# Altium PCB PCB2.PcbDoc
Units mil, origin at the board's own origin, x right, y up, seen from the top; angles counter-clockwise.
Board outline 2165.35 x 4330.71 mil, 2 copper layers (Top Layer, Bottom Layer); 8 components, 38 nets, 180 pads, 57 vias.
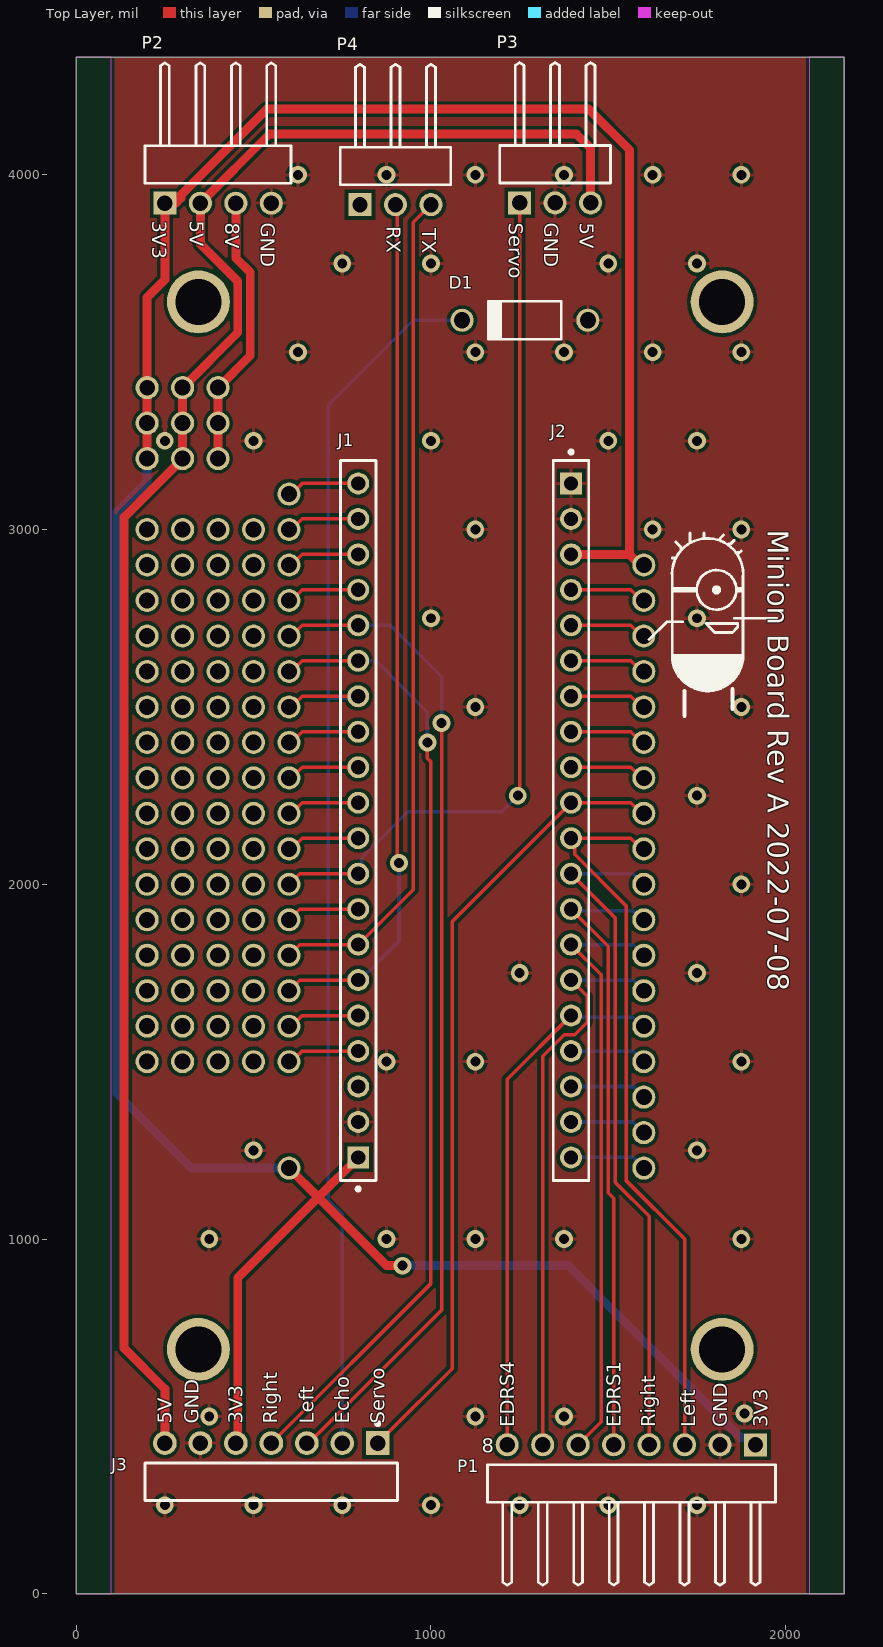
[diagram p0: Top Layer view]
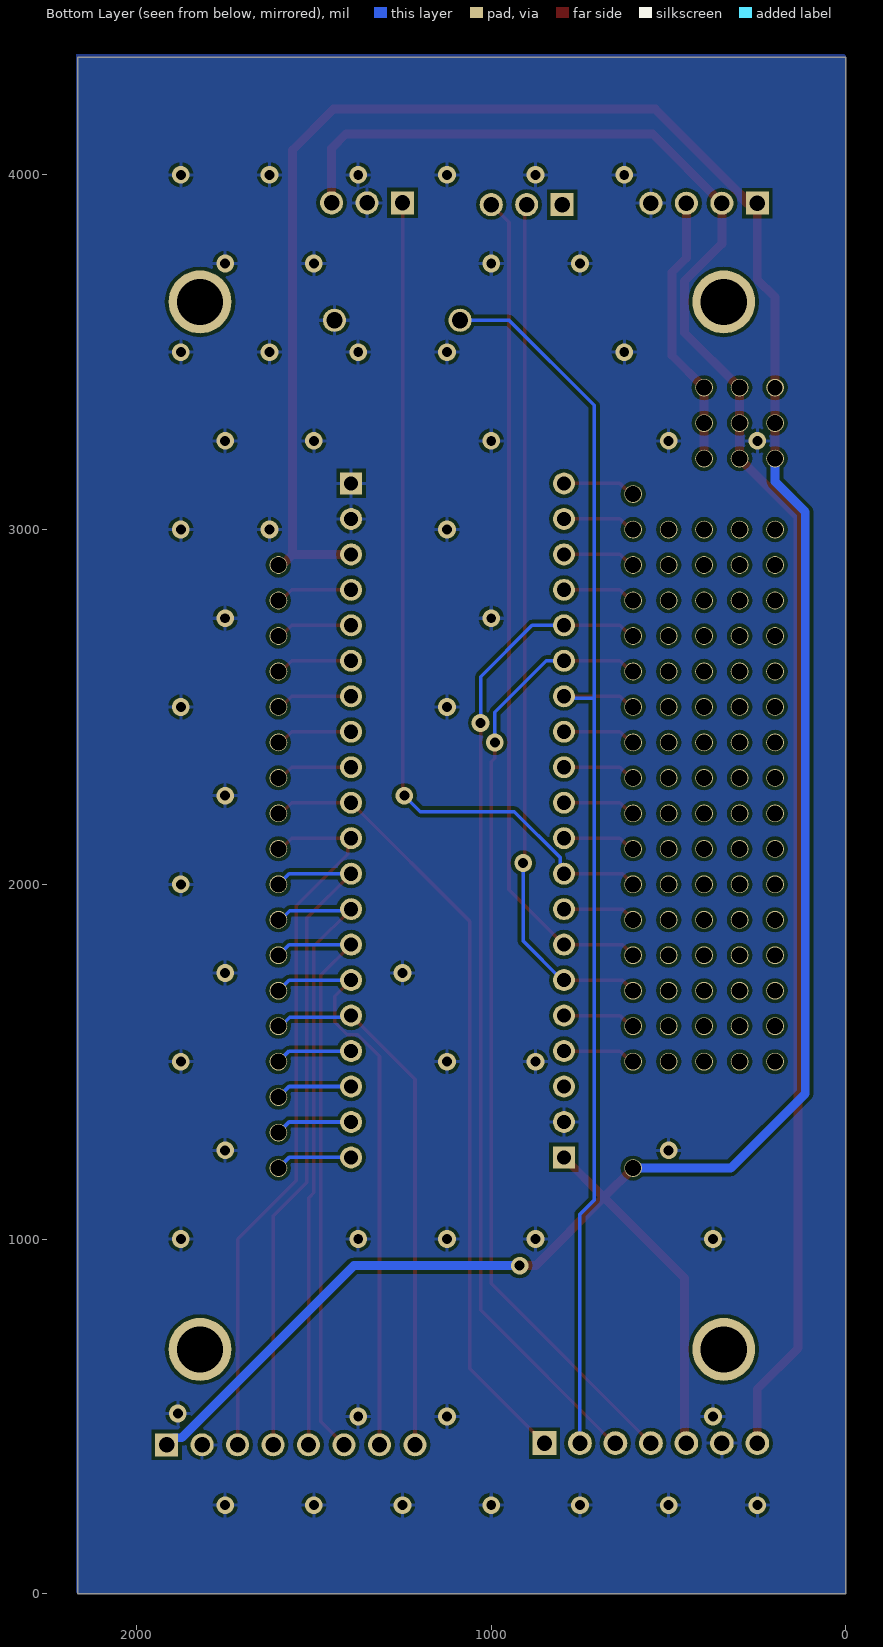
[diagram p1: Bottom Layer view, seen from below]
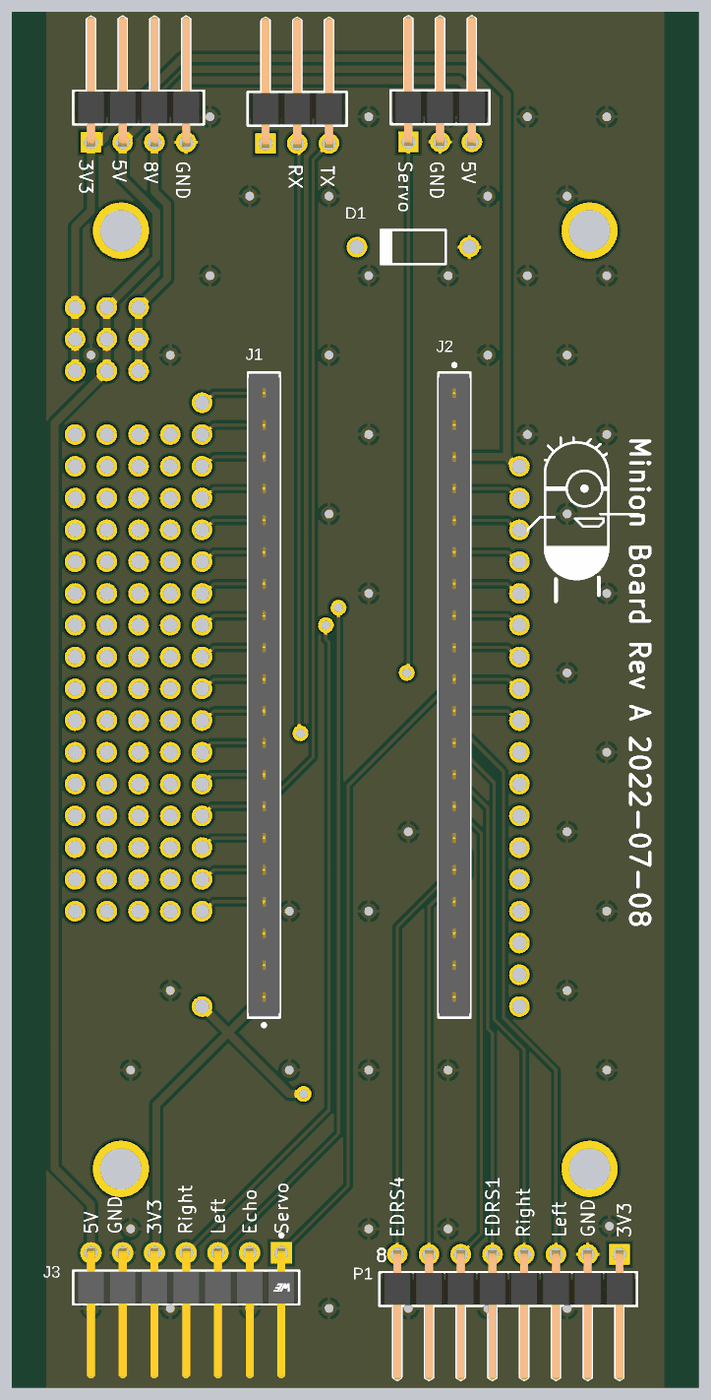
[diagram p2: 3D render of the assembled board from above, using the file's embedded part models]

## Layer stack, top to bottom
Top Solder: solder mask 0.4, Solder Resist, Dk 3.5
Top Layer: signal copper 1.4
Dielectric 1: dielectric 12.6, FR-4, Dk 4.8
Bottom Layer: signal copper 1.4
Bottom Solder: solder mask 0.4, Solder Resist, Dk 3.5

## Board outline
0,0 0,4330.71 2165.35,4330.71 2165.35,0

## Design rules (kind name [scope] priority, off if disabled: settings)
Clearance [All] p1: gap=10 ignorepadtopadclearanceinfootprint=FALSE except(0: Arc-Hole Track-Hole SMDPad-Hole THPad-Hole Via-Hole Fill-Hole Poly-Hole Region-Hole Text-Hole)
PolygonConnect [All] p1: connectstyle=Relief reliefconductorwidth=10 reliefentries=4 polygonreliefangle="90 Angle" airgapwidth=10
RoutingVias [All] p1: holewidth=28 width=50 viastyle="Through Hole" minholewidth=28 minwidth=50 maxholewidth=28 maxwidth=50
SolderMaskExpansion [All] p1: expansion=4 istentingtop=FALSE
Width "PWR/GND Thickness" [InNet('GND') Or InNet('5V')Or InNet('3V3') Or InNet('8V')] p1: maxlimit=25 minlimit=25 preferedwidth=25 minimp=50.000000 maximp=50.000000 favimp=50.000000
Width [All] p2: maxlimit=10 minlimit=10 preferedwidth=10
30 further rules are at their usual default settings.

## Components (designator, comment, footprint, x,y, rotation, side; value= is the part's Value field where it differs from the comment)
D1 "1N4728A" FAIR-DO-41-2_V 1265,3590 r180 top
J1 "ESQ-120-14-G-S" FP-ESQ-120-14-G-S-MFG 795,2180 r90 top locked
J2 "ESQ-120-14-G-S" FP-ESQ-120-14-G-S-MFG 1395,2180 r270 top locked
J3 "61300711021" FP-61300711021-MFG 550,315.75 r180 top locked
P1 "61300811021" 61300811021 1565,310.94 r0 top locked
P2 "61300411021" 61300411021 400,4029.06 r180 top locked
P3 "61300311021" 61300311021 1350,4030 r180 top locked
P4 "61300311021" 61300311021 900,4025 r180 top locked

## Footprints (in the part's own frame and the unit in brackets; to place one, negate y for a bottom-side part, rotate by r counter-clockwise, add the part's x,y. Pads: shape width x height; smd on the part's side, far side on the other; paste and mask are expansions set on the pad)
61300311021 [mm] "Pin Header, pitch 2.54 mm, THT, Angled, single row, 3p"
  rect 1.65x1.65 hole 1.1: 1(2.54,2.77)
  round 1.65 hole 1.1: 2(0,2.77) 3(-2.54,2.77)
  silkscreen extent -3.96,-7.27 3.96,1.35, body extent -3.81,-7.27 3.81,3.09, height 2.58
61300411021 [mm] "Pin Header, pitch 2.54 mm, THT, Angled, single row, 4p"
  rect 1.65x1.65 hole 1.1: 1(3.81,2.77)
  round 1.65 hole 1.1: 2(1.27,2.77) 3(-1.27,2.77) 4(-3.81,2.77)
  silkscreen extent -5.23,-7.27 5.23,1.35, body extent -5.08,-7.27 5.08,3.09, height 2.58
61300811021 [mm] "Pin Header, pitch 2.54 mm, THT, Angled, single row, 8p"
  rect 1.65x1.65 hole 1.1: 1(8.89,2.77)
  round 1.65 hole 1.1: 2(6.35,2.77) 3(3.81,2.77) 4(1.27,2.77) 5(-1.27,2.77) 6(-3.81,2.77) 7(-6.35,2.77) 8(-8.89,2.77)
  silkscreen extent -10.31,-7.27 10.31,1.35, body extent -10.16,-7.27 10.16,3.09, height 2.58
FAIR-DO-41-2_V [mm] "2-Leads, Axial leaded, Body 2.72x5.2mm, Pin Spacing 9mm"
  round 1.65 hole 1.15: 1(-4.5,0) 2(4.5,0)
  silkscreen extent -2.6,-1.36 2.6,1.36, body extent -4.93,-1.36 4.93,1.36, height 2.71
FP-61300711021-MFG [mm]
  rect 1.7x1.7 hole 1.1 paste-1000 mask+0: 1(-7.62,-2.77)
  round 1.7 hole 1.1 paste-1000 mask+0: 2(-5.08,-2.77) 3(-2.54,-2.77) 4(0,-2.77) 5(2.54,-2.77) 6(5.08,-2.77) 7(7.62,-2.77)
  silkscreen extent -9.04,-4.29 9.04,1.35, body extent -9.14,-3.72 9.14,7.92, height 0.25
FP-ESQ-120-14-G-S-MFG [mm]
  rect 1.57x1.57 hole 1.02 paste-1000 mask+0: 1(-24.13,0)
  round 1.57 hole 1.02 paste-1000 mask+0: 2(-21.59,0) 3(-19.05,0) 4(-16.51,0) 5(-13.97,0) 6(-11.43,0) 7(-8.89,0) 8(-6.35,0) 9(-3.81,0) 10(-1.27,0) 11(1.27,0) 12(3.81,0) 13(6.35,0) 14(8.89,0) 15(11.43,0) 16(13.97,0) 17(16.51,0) 18(19.05,0) 19(21.59,0) 20(24.13,0)
  silkscreen extent -26.51,-1.27 25.78,1.27, body extent -25.88,-1.37 25.88,1.37, height 0.25

## Part data
D1: library part CMP-0892-00028-1, "Zener Diode, 3.3V, 1W, 5%, -65 to 200 degC, 2-Pin DO-41, Body 2.72 x 5.2 mm, RoHS", Manufacturer="Fairchild Semiconductor", Operating and Storage Temperature Range="-65 to 200 degC", Test Current IZ (mA)=76, Tolerance=5%, ComponentLink1Description="Manufacturer URL", ComponentLink1URL=http://www.fairchildsemi.com/, ComponentLink2Description=Datasheet, ComponentLink2URL=http://www.fairchildsemi.com/ds/1N/1N4744A.pdf, ComponentLink3Description="Package Specification", ComponentLink3URL=http://www.fairchildsemi.com/dwg/DO/DO41A.pdf, DatasheetVersion="Rev. H3", IR (uA)=100, Mounting Technology="Through Hole", PackageDescription="2-Pin Axial leaded, Body 2.72 x 5.2 mm, Lead Spread 25.4 mm", PackageReference=DO-41-2, PackageVersion="Rev. 2", PartNumber=1N4728A, PD (W)=1, RoHS=TRUE, VZ (Max.) (V)=3.465, VZ (Min.) (V)=3.135, ZZ (Max) (ohm)=10
J1 J2: library part CMP-02766-000124-1, "CONN SOCKET 20POS 0.1 GOLD PCB", Color=Black, Contact Resistance=10mR, Max Current Rating=6.9A, Max Operating Temperature=125°C, Max Voltage Rating (AC)=550V, Min Operating Temperature=-55°C, Connector Type=Receptacle, Contact Material=Bronze, Contact Plating=Gold, Depth=2.41mm, Gender=Receptacle, Housing Color=Black, Housing Material=Polyester, Length=51.31mm, Mount="Through Hole", Number of Contacts=20, Number of Positions=20, Number of Rows=1, Orientation=Straight, Packaging=Rail/Tube, Pitch=2.54mm, Radiation Hardening=No, REACH SVHC="No SVHC", Termination=Solder
J3: library part CMP-1502-01073-2, "CONN HEADER R/A 7POS 2.54MM", Color=Black, Connector Type="Male Pin", Contact Material=Copper, Contact Mating Length=0.236inch, Contact Plating=Gold, Contact Type="Male Pin", Gender=Male, Mount="Through Hole", Number of Contacts=7, Number of Positions=7, Number of Rows=1, Packaging=Bulk, Pitch=0.1inch, Series=WR-PHD, Termination=Solder
P1: library part CMP-1502-01075-1, "THT Angled Pin Header WR-PHD, Pitch 2.54 mm, Single Row, 8 pins", Contact Resistance=20mOhm, Manufacturer="Wurth Elektronik", Operating Temperature=-40to105degC, Rated Current=3A, Withstanding Voltage=500VAC, Working Voltage=250VAC, Datasheet URL=https://katalog.we-online.de/em/datasheet/6130xx11021.pdf, Gender=Male, Manufacturer URL=http://www.we-online.de, Mounting Technology=THT, Orientation=Angled, Package Reference=61300811021, Packaging=Bag, Part Number=61300811021, Pin Number=8, Pitch=2.54mm, Publisher=WurthElektronik, Row Number=Single
P2: library part CMP-1502-01063-1, "THT Angled Pin Header WR-PHD, Pitch 2.54 mm, Single Row, 4 pins", Contact Resistance=20mOhm, Manufacturer="Wurth Elektronik", Operating Temperature=-40to105degC, Rated Current=3A, Withstanding Voltage=500VAC, Working Voltage=250VAC, Datasheet URL=https://katalog.we-online.de/em/datasheet/6130xx11021.pdf, Gender=Male, Manufacturer URL=http://www.we-online.de, Mounting Technology=THT, Orientation=Angled, Package Reference=61300411021, Packaging=Bag, Part Number=61300411021, Pin Number=4, Pitch=2.54mm, Publisher=WurthElektronik, Row Number=Single
P3 P4: library part CMP-1502-01061-1, "THT Angled Pin Header WR-PHD, Pitch 2.54 mm, Single Row, 3 pins", Contact Resistance=20mOhm, Manufacturer="Wurth Elektronik", Operating Temperature=-40to105degC, Rated Current=3A, Withstanding Voltage=500VAC, Working Voltage=250VAC, Datasheet URL=https://katalog.we-online.de/em/datasheet/6130xx11021.pdf, Gender=Male, Manufacturer URL=http://www.we-online.de, Mounting Technology=THT, Orientation=Angled, Package Reference=61300311021, Packaging=Bag, Part Number=61300311021, Pin Number=3, Pitch=2.54mm, Publisher=WurthElektronik, Row Number=Single

## Free pads (board coordinates)
  round 177.17 hole 129.92: 12(344.49,688.98) 12(344.49,3641.73) 13(1820.87,688.98) 13(1820.87,3641.73)
  round 65 / inner rrect50% 67x50 / far side round 50 hole 43: 24(200,3400)
  round 65 / inner rrect50% 67x50 / far side round 50 hole 45: 35(300,3400) 36(400,3400) 39(400,3300) 40(300,3300) 41(200,3300) 42(200,3200) 43(300,3200) 44(400,3200) 46(200,1500) 46(200,2300) 46(400,1500) 46(400,2300) 47(200,2200) 47(200,3000) 47(400,2200) 47(400,3000) 48(200,2100) 48(200,2900) 48(400,2100) 48(400,2900) 49(200,2000) 49(200,2800) 49(400,2000) 49(400,2800) 50(200,1900) 50(200,2700) 50(400,1900) 50(400,2700) 51(200,1800) 51(200,2600) 51(400,1800) 51(400,2600) 52(300,1800) 52(300,2600) 52(500,1800) 52(500,2600) 53(300,1900) 53(300,2700) 53(500,1900) 53(500,2700) 54(300,2000) 54(300,2800) 54(500,2000) 54(500,2800) 55(300,2100) 55(300,2900) 55(500,2100) 55(500,2900) 56(300,2200) 56(300,3000) 56(500,2200) 56(500,3000) 57(300,1500) 57(300,2300) 57(500,1500) 57(500,2300) 58(600,2400) 58(1600,1400) 58(1600,2400) 59(600,2100) 59(600,2300) 59(600,3100) 59(1600,1300) 59(1600,2100) 59(1600,2300) 60(600,1200) 60(600,2000) 60(600,2200) 60(600,3000) 60(1600,1200) 60(1600,2000) 60(1600,2200) 61(600,1900) 61(600,2900) 61(1600,1900) 61(1600,2900) 62(600,1800) 62(600,2800) 62(1600,1800) 62(1600,2800) 63(600,1700) 63(600,2700) 63(1600,1700) 63(1600,2700) 64(200,1700) 64(200,2500) 64(400,1700) 64(400,2500) 65(200,1600) 65(200,2400) 65(400,1600) 65(400,2400) 66(300,1600) 66(300,2400) 66(500,1600) 66(500,2400) 67(300,1700) 67(300,2500) 67(500,1700) 67(500,2500) 68(600,1600) 68(600,2600) 68(1600,1600) 68(1600,2600) 69(600,1500) 69(600,2500) 69(1600,1500) 69(1600,2500)

## Via types
v1: diameter 50, hole 28, Top Layer to Bottom Layer, tented both sides, 52 vias
v2: diameter 50, hole 28, Top Layer to Bottom Layer, 5 vias

## Nets (pads, with @x,y where several pads share a name; then routed paths per layer and width w, separated by ;. In a path a pad name is that pad's centre, name@x,y a point inside that pad or via, vN(x,y) a via of type N, cw(c..) or ccw(c..) an arc to the next point about the centre after c; other vN are vias at no path point)
3V3: J1.1 J2.3 J3.5 P1.1 P2.1 pad.24 pad.41 pad.42 pad.60@600,1200 pad.61@1600,2900 | length 8554
  Top Layer w25: pad.42 pad.41 pad.24 200,3654.34 250,3704.34 P2.1 280.38,3920 295.02,3934.64 295.02,3942.77 537.25,4185 1445,4185 1560,4070 1560,2930.82 1559.18,2930 ; J3.5 455.57,430.37 455.57,890.57 682.5,1117.5 ; pad.60@600,1200 682.5,1117.5 ; J1.1 682.5,1117.5 ; v2(920,925) 875,925 682.5,1117.5 ; J2.3 1559.18,2930 ; pad.61@1600,2900 1589.18,2900 1559.18,2930
  Bottom Layer w25: pad.42 200,3135 115,3050 115,1410 325,1200 pad.60@600,1200 ; v2(920,925) 1387.75,925 1872.77,439.98 1895.02,439.98 P1.1
5V: J3.7 P2.2 P3.3 pad.35 pad.40 pad.43 | length 5070.7
  Top Layer w25: J3.7 250,577.27 135,692.27 135,3035 pad.43 pad.40 pad.35 455.57,3555.57 455.57,3699.67 350,3805.24 P2.2 545,4115 1410,4115 1450,4075 P3.3
8V: P2.3 pad.36 pad.39 pad.44 | length 774.3
  Top Layer w25: pad.44 pad.39 pad.36 490.57,3490.57 490.57,3724.92 450,3765.49 P2.3
bridge_servo: J1.9 P3.1 pad.60@600,2000 | length 2415
  Top Layer w10: pad.60@600,2000 630,2030 J1.9 ; 1250,2275 1250,2320 P3.1
  Bottom Layer w10: J1.9 804.91,2039.91 804.91,2074.91 935,2205 1200,2205 v2(1245,2250)
Echo: D1.2 J1.14 J3.2 pad.69@600,2500 | length 3713.5
  Top Layer w10: pad.69@600,2500 607.17,2500 637.17,2530 J1.14
  Bottom Layer w10: J3.2 750,1070 710,1110 710,2525 ; J1.14 790,2525 710,2525 ; D1.2 950,3590 710,3350 710,2525
EDRS1: J2.13 P1.5 pad.61@1600,1900 | length 1777.1
  Top Layer w10: J2.13 1500,1825 1500,1130.43 1515,1115.43 P1.5
  Bottom Layer w10: J2.13 1400,1925 1568.43,1925 1593.43,1900 pad.61@1600,1900
EDRS2: J2.14 P1.6 pad.62@1600,1800 | length 1689.6
  Top Layer w10: J2.14 1480,1745 1480,485 P1.6
  Bottom Layer w10: J2.14 1570,1830 pad.62@1600,1800
EDRS3: J2.15 P1.7 pad.63@1600,1700 | length 1616.1
  Top Layer w10: P1.7 1315,1514.92 1375.99,1575.91 1405.83,1575.91 1440.91,1610.99 1440.91,1684.09 J2.15
  Bottom Layer w10: J2.15 1570,1730 pad.63@1600,1700
EDRS4: J2.16 P1.8 pad.68@1600,1600 | length 1502
  Top Layer w10: P1.8 1215,1450 J2.16
  Bottom Layer w10: J2.16 1400,1625 1568.43,1625 1593.43,1600 pad.68@1600,1600
GND: D1.1 J1.2 J2.1 J2.2 J3.6 P1.2 P2.4 P3.2
  other v1: 250,250 500,250 750,250 1000,250 1250,250 1500,250 1750,250 375,500 1125,500 1375,500 1883.59,508.59 375,1000 875,1000 1125,1000 1375,1000 1875,1000 500,1250 1750,1250 875,1500 1125,1500 1875,1500 1250,1750 1750,1750 1875,2000 1750,2250 1125,2500 1875,2500 1000,2750 1750,2750 1125,3000 1625,3000 1875,3000 250,3250 500,3250 1000,3250 1500,3250 1750,3250 625,3500 1125,3500 1375,3500 1625,3500 1875,3500 750,3750 1000,3750 1500,3750 1750,3750 625,4000 875,4000 1125,4000 1375,4000 1625,4000 1875,4000
LFRS_L: J2.11 P1.3 pad.59@1600,2100 | length 2060
  Top Layer w10: pad.59@1600,2100 1592.83,2100 1562.83,2130 J2.11 1404.91,2120.09 1404.91,2085.01 1550,1939.92 1550,1165 1715,1000 P1.3
LFRS_R: J2.12 P1.4 pad.60@1600,2000 | length 1918.6
  Top Layer w10: J2.12 1520,1905 1520,1159.54 1615,1064.54 P1.4
  Bottom Layer w10: J2.12 1570,2030 pad.60@1600,2000
NRST: J2.4 pad.62@1600,2800 | length 217.4
  Top Layer w10: J2.4 1562.83,2830 1592.83,2800 pad.62@1600,2800
PA7: J2.9 pad.59@1600,2300 | length 217.4
  Top Layer w10: J2.9 1562.83,2330 1592.83,2300 pad.59@1600,2300
PA11: J1.13 pad.58@600,2400 | length 214.5
  Top Layer w10: pad.58@600,2400 607.17,2400 637.17,2430 J1.13 J1.13@790,2425
PA12: J1.12 pad.59@600,2300 | length 207.4
  Top Layer w10: pad.59@600,2300 607.17,2300 637.17,2330 J1.12
PA15: J1.11 pad.60@600,2200 | length 207.4
  Top Layer w10: pad.60@600,2200 607.17,2200 637.17,2230 J1.11
PB0: J2.8 pad.58@1600,2400 | length 217.4
  Top Layer w10: J2.8 1562.83,2430 1592.83,2400 pad.58@1600,2400
PB1: J2.7 pad.69@1600,2500 | length 217.4
  Top Layer w10: J2.7 1562.83,2530 1592.83,2500 pad.69@1600,2500
PB3: J1.10 pad.59@600,2100 | length 207.4
  Top Layer w10: pad.59@600,2100 607.17,2100 637.17,2130 J1.10
PB5: J1.8 pad.61@600,1900 | length 207.4
  Top Layer w10: pad.61@600,1900 630,1930 J1.8
PB8: J1.5 pad.68@600,1600 | length 207.4
  Top Layer w10: pad.68@600,1600 607.17,1600 637.17,1630 J1.5
PB9: J1.4 pad.69@600,1500 | length 207.4
  Top Layer w10: pad.69@600,1500 607.17,1500 637.17,1530 J1.4
PB10: J2.6 pad.68@1600,2600 | length 217.4
  Top Layer w10: J2.6 1562.83,2630 1592.83,2600 pad.68@1600,2600
PB11: J2.5 pad.63@1600,2700 | length 217.4
  Top Layer w10: J2.5 1562.83,2730 1592.83,2700 pad.63@1600,2700
PB12: J1.20 pad.59@600,3100 | length 207.4
  Top Layer w10: pad.59@600,3100 607.17,3100 637.17,3130 J1.20
PB13: J1.19 pad.60@600,3000 | length 207.4
  Top Layer w10: pad.60@600,3000 607.17,3000 637.17,3030 J1.19
PB14: J1.18 pad.61@600,2900 | length 207.4
  Top Layer w10: pad.61@600,2900 607.17,2900 637.17,2930 J1.18
PB15: J1.17 pad.62@600,2800 | length 207.4
  Top Layer w10: pad.62@600,2800 607.17,2800 637.17,2830 J1.17
PC13: J2.19 pad.59@1600,1300 | length 217.4
  Bottom Layer w10: J2.19 1570,1330 pad.59@1600,1300
PC14: J2.18 pad.58@1600,1400 | length 217.4
  Bottom Layer w10: J2.18 1570,1430 pad.58@1600,1400
PC15: J2.17 pad.69@1600,1500 | length 217.4
  Bottom Layer w10: J2.17 1570,1530 pad.69@1600,1500
Serial1_RX: J1.6 P4.2 pad.63@600,1700 | length 2448.1
  Top Layer w10: pad.63@600,1700 630,1730 J1.6 ; P4.2 905,3910.94 905,2065 v2(910,2060)
  Bottom Layer w10: J1.6 800,1730 910,1840 910,2025 v2(910,2060)
Serial1_TX: J1.7 P4.3 pad.62@600,1800 | length 2378.3
  Top Layer w10: pad.62@600,1800 630,1830 J1.7 950,1985 950,3865.94 P4.3
trig_L: J1.16 J3.3 pad.63@600,2700 | length 2822.9
  Top Layer w10: pad.63@600,2700 607.17,2700 637.17,2730 J1.16 ; J3.3 654.8,424.8 1030,800 1030,2440 v2(1030,2455)
  Bottom Layer w10: J1.16 885,2730 1030,2585 v2(1030,2455)
trig_R: J1.15 J3.4 pad.68@600,2600 | length 2713.2
  Top Layer w10: J3.4 1000,874.8 1000,2345 990,2355 v2(990,2400) ; pad.68@600,2600 607.17,2600 637.17,2630 J1.15
  Bottom Layer w10: J1.15 845,2630 990,2485 v2(990,2400)
trig_servo: J2.10 J3.1 pad.60@1600,2200 | length 2248.4
  Top Layer w10: J3.1 878.46,453.27 1060,634.8 1060,1895 J2.10 1562.83,2230 1592.83,2200 pad.60@1600,2200
VBAT: J2.20 pad.60@1600,1200 | length 217.4
  Bottom Layer w10: J2.20 1570,1230 pad.60@1600,1200
pads on no net: J1.3 P4.1

## Polygon pours and split planes (outlines as drawn)
GND on Bottom Layer "GND_L02_P000" (solid, pour order 0): 0,4335 5,4340 2170,4340 2170,5 2165,0 0,0
GND on Top Layer "GND_L01_P002" (solid, pour order 2): 0,4330.71 2165.35,4330.71 2165.35,0 0,0

## Keep-outs
Top Layer:
  rectangle: 0,0 98.43,4330.71
  rectangle: 2066.93,0 2165.35,4330.71

## Silkscreen, mask and mechanical layers (free items; w line width, h text height)
Top Overlay:
  circle w18: c1805,2830 r4
  circle w7.78: c1805,2830 r55.9
  region: 1680,2645 1880,2645 1880,2620 1870,2610 1870,2595 1835,2560 1815,2555 1800,2545 1760,2545 1750,2550 1735,2555 1715,2570 1710,2575 1695,2590 1695,2600 1690,2595 1685,2615 1680,2625
  lines w7.78: 1679.88,2875 cw(c1780,2875) 1880.12,2875 ; 1680,2645 ccw(c1780,2645) 1880,2645
  lines w7.87: 1615,2690 1665,2740 1710,2740 ; 1680,2875 1680,2645 1880,2645 1880,2870 ; 1680,2920 1690,2920 ; 1690,2965 1705,2950 1705,2945 ; 1730,2965 1730,2990 ; 1770,2975 1770,2990 ; 1815,2970 1815,2975 1825,2985 ; 1840,2960 1845,2960 1855,2970 ; 1855,2750 1975,2750 ; 1865,2935 1870,2935 1875,2940 ; 1775,2735 1865,2735 1865,2725 1850,2710 1800,2710 1775,2735
  lines w12: 1715,2475 1715,2545 ; 1850,2495 1850,2550
  lines w15: 1685,2830 1745,2830 ; 1865,2830 1876,2830
  text "3V3" at 215,3870 h40 r270
  text "5V" at 320,3870 h40 r270
  text "8V" at 420,3865 h40 r270
  text "GND" at 520,3865 h40 r270
  text "Servo" at 1220,3865 h40 r270
  text "GND" at 1320,3865 h40 r270
  text "5V" at 1420,3865 h40 r270
  text "RX" at 875,3855 h40 r270
  text "TX" at 975,3850 h40 r270
  text "Minion Board Rev A 2022-07-08" at 1950,3000 h60 r270
  text "5V" at 270,480 h40 r90
  text "GND" at 345,480 h40 r90
  text "3V3" at 470,480 h40 r90
  text "Right" at 566.67,480 h40 r90
  text "Left" at 670,480 h40 r90
  text "Echo" at 770,480 h40 r90
  text "Servo" at 870,480 h40 r90
  text "EDRS4" at 1235,470 h40 r90
  text "EDRS1" at 1535,470 h40 r90
  text "Right" at 1631.67,470 h40 r90
  text "Left" at 1745,470 h40 r90
  text "GND" at 1835,470 h40 r90
  text "3V3" at 1950,470 h40 r90
Mechanical 1:
  the board outline again, w10

## Dimensions
0,4337.13 to 250,3920 on Mechanical 1
1000,3915.94 to 1250,3920.94 on Mechanical 1
795,1330 to 1395,1330 on Mechanical 1
1395,1230 to 2165.35,4330.71 on Mechanical 1
795,1330 to 1395,3030 on Mechanical 1
1395,3130 to 2165.35,0 on Mechanical 1
795,1230 to 1395,3130 on Mechanical 1
0,0 to 250,424.8 on Mechanical 1
1915,420 to 2165.35,0 on Mechanical 1
393.62,3648.15 to -0.08,4337.13 on Mechanical 1
1820.87,688.98 to 1820.87,3641.73 on Mechanical 1
344.49,3641.73 to 0,4330.71 on Mechanical 1
1820.87,3641.73 to 2165.35,4330.71 on Mechanical 1
1820.87,3641.73 to 2165.35,4330.71 on Mechanical 1
344.49,3641.73 to 0,4330.71 on Mechanical 1
344.49,3641.73 to 1820.87,3641.73 on Mechanical 1
2165.35,0 to 2165.35,4330.71 on Mechanical 1
0,0 to 2165.35,0 on Mechanical 1
1820.87,688.98 to 2165.35,0 on Mechanical 1
344.49,688.98 to 0,0 on Mechanical 1
0,0 to 344.49,688.98 on Mechanical 1
1820.87,688.98 to 2165.35,0 on Mechanical 1
344.49,688.98 to 1820.87,688.98 on Mechanical 1

## Text inside footprints (layer, text, board x,y; h text height)
P1: Top Overlay "8" at 1142.56,397.56 h40